# EAGLE board ESP8266-07_Breakout (EAGLE 7.5.0)
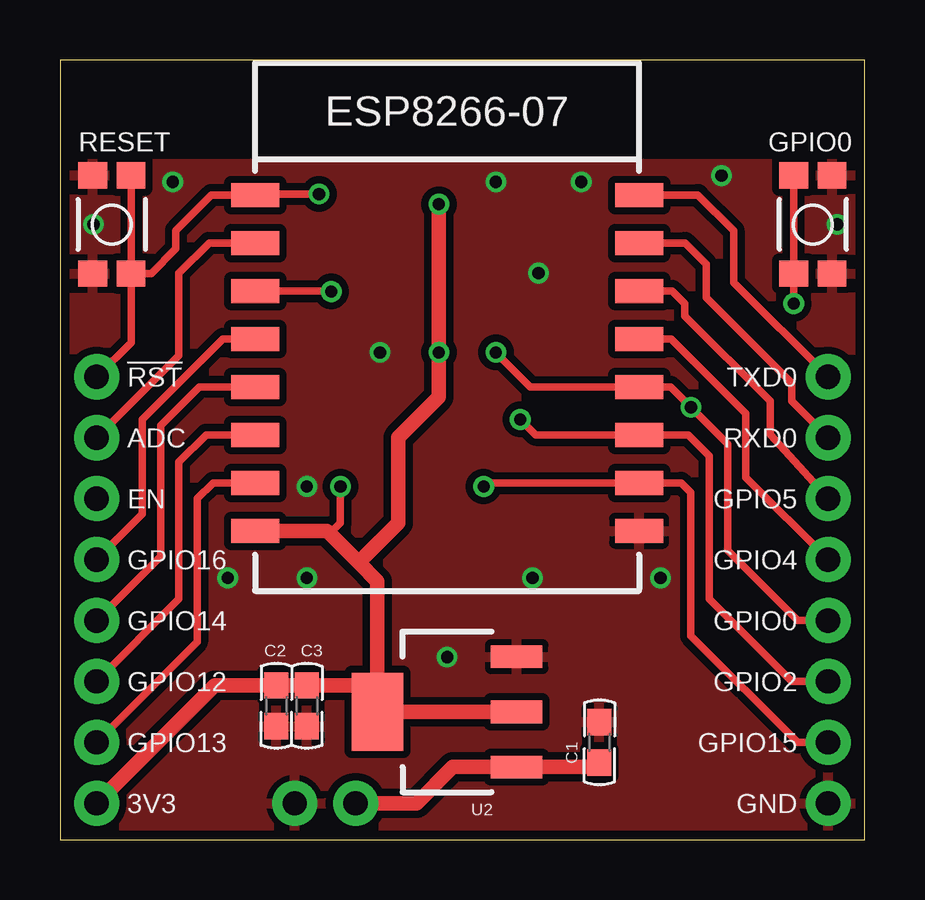
[diagram p0: board, top side]
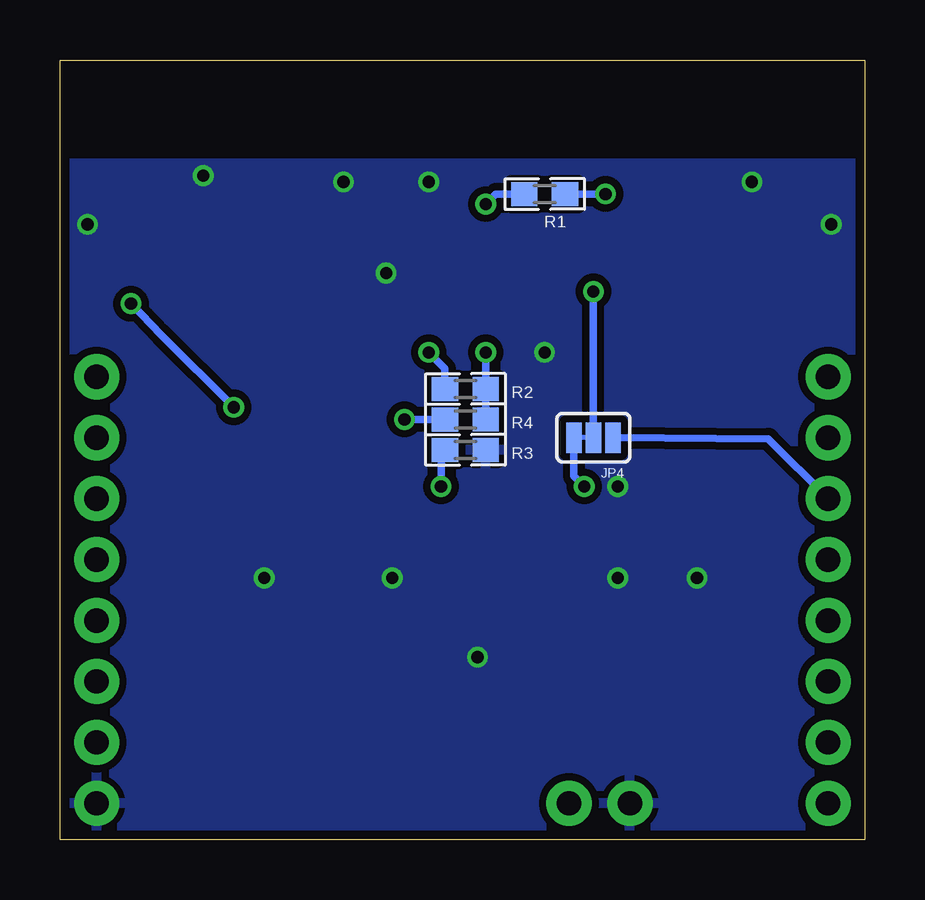
[diagram p1: board, bottom side, seen from below]

Size 33.53 x 32.51 mm. Coordinates in mm from the lower left corner, seen from the top.
Outline: 0,0 33.53,0 33.53,32.51 0,32.51 0,0
Copper layers (1*16): Top 0.0356mm / dielectric 1.5011mm / Bottom 0.0356mm
Design rules "heck": minimum track width 6mil, minimum drill 13mil, track to track 6mil, track to pad 6mil, pad to pad 6mil, via to via 6mil, smd to smd 6mil, copper to edge 15mil, drill to drill 6mil, minimum pad ring 7mil, minimum via ring 7mil, stop-mask expansion 3mil, vias tented up to drill 20mil, thermal gap 10mil

## Footprints (pad centres in the part's own frame; a part is rotated, then mirrored left to right if it is on the bottom)
C0603 = smd 1.1 x 1: 1 -0.85,0; 2 0.85,0
HEADER_100MIL_1X8 = drill 1.016 pad 1.88: 1 -8.89,0; 2 -6.35,0; 3 -3.81,0; 4 -1.27,0; 5 1.27,0; 6 3.81,0; 7 6.35,0; 8 8.89,0
HEADER_100MIL_1X2 = drill 1.016 pad 1.88: 1 -1.27,0; 2 1.27,0
PAD-JUMPER-3-2OF3_NC_BY_TRACE_YES_SILK_FULL_BOX = smd 0.635 x 1.27: 1 -0.813,0; 2 0,0; 3 0.813,0
R0603 = smd 1.1 x 1: 1 -0.85,0; 2 0.85,0
TACTILE_SWITCH_SMD-3 = smd 1.1 x 1.2: 1 -2.05,0.8; 2 2.05,0.8; 3 -2.05,-0.8; 4 2.05,-0.8
ESP8266-07 = smd 1 x 2: 1 11.5,8; 2 9.5,8; 3 7.5,8; 4 5.5,8; 5 3.5,8; 6 1.5,8; 7 -0.5,8; 8 -2.5,8; 9 -2.5,-8; 10 -0.5,-8; 11 1.5,-8; 12 3.5,-8; 13 5.5,-8; 14 7.5,-8; 15 9.5,-8; 16 11.5,-8
SOT223 = smd 0.95 x 2.15: 1 -2.3,-2.9; 2 0,-2.9; 3 2.3,-2.9 | smd 3.25 x 2.15: TAB 0,2.9

## Placement (x,y rotation side)
C1  1uF  [C0603]  22.48,4.06 90 top
C2  1uF  [C0603]  9.02,5.59 270 top
C3  0.1uF  [C0603]  10.29,5.59 270 top
JP1  HEADER_1X8_100MIL_PTH  [HEADER_100MIL_1X8]  32,10.41 270 top
JP2  HEADER_1X8_100MIL_PTH  [HEADER_100MIL_1X8]  1.52,10.41 270 top
JP3  HEADER_1X2_100MIL  [HEADER_100MIL_1X2]  11.05,1.52 180 top
JP4  JUMPER-PAD-3-2OF3_NC_BY_TRACE  [PAD-JUMPER-3-2OF3_NC_BY_TRACE_YES_SILK_FULL_BOX]  11.3,16.76 180 bottom
R1  20K  [R0603]  13.34,26.92 180 bottom
R2  20K  [R0603]  16.64,18.8 0 bottom
R3  20K  [R0603]  16.64,16.26 180 bottom
R4  20K  [R0603]  16.64,17.53 0 bottom
SW1  KMR221GLFS  [TACTILE_SWITCH_SMD-3]  2.16,25.65 270 top
SW2  KMR221GLFS  [TACTILE_SWITCH_SMD-3]  31.37,25.65 90 top
U1  ESP8266-07  [ESP8266-07]  16.13,24.38 270 top
U2  TLV1114DCY  [SOT223]  16.13,5.33 90 top

## Library data of the parts
C1-C3 JP1-JP4 R1-R4 SW1 SW2 U1 U2 = heck

## Nets
3.3V: C2.1 C3.1 JP2.8 JP4.3 R1.2 R2.2 R4.2 U1.16 U2.2 U2.TAB
!RST: JP2.1 R1.1 SW1.1 SW1.2 U1.9
ADC: JP2.2 U1.10
EN: JP4.2 U1.11
GND: C1.2 C2.2 C3.2 JP1.8 JP3.2 R3.1 SW1.3 SW1.4 SW2.3 SW2.4 U1.1 U2.3
GPIO0: JP1.5 R2.1 SW2.1 SW2.2 U1.4
GPIO2: JP1.6 R4.1 U1.3
GPIO4: JP1.4 U1.5
GPIO5: JP1.3 U1.6
GPIO12: JP2.6 U1.14
GPIO13: JP2.7 U1.15
GPIO14: JP2.5 U1.13
GPIO15: JP1.7 R3.2 U1.2
GPIO16: JP2.4 U1.12
N$11: JP2.3 JP4.1
RXD0: JP1.2 U1.7
TXD0: JP1.1 U1.8
VIN: C1.1 JP3.1 U2.1

## Tracks (layer width: path | path; a pad name or v marks a point on that pad's centre or on a via)
3.3V  (via drill 0.51)
  Top 0.305: v11.68,14.73 11.68,13.21 11.24,12.76
  Top 0.61: U1.16 11.12,12.88 11.24,12.76 12.45,11.56 | 12.45,11.56 13.23,10.77 13.23,6.35 | 13.23,6.35 U2.TAB U2.2 | JP2.8 6.44,6.44 C2.1 C3.1 13.14,6.44 13.23,6.35 | 12.45,11.56 14.1,13.21 14.1,16.76 15.79,18.45 v15.79,20.32 v15.79,26.5
  Bottom 0.305: R4.2 R2.2 v15.79,20.32 | R1.2 15.37,26.92 v15.79,26.5 | JP4.3 12.12,15.16 v11.68,14.73
!RST  (via drill 0.51)
  Top 0.305: SW1.1 SW1.2 | v10.79,26.92 8.17,26.92 U1.9 6.31,26.88 4.83,25.4 4.83,24.64 3.79,23.6 SW1.2 | SW1.2 2.96,20.74 JP2.1
  Bottom 0.305: R1.1 v10.79,26.92
ADC
  Top 0.305: U1.10 6.21,24.88 4.95,23.62 4.95,20.19 JP2.2
EN  (via drill 0.51)
  Top 0.305: U1.11 11.28,22.88 v11.3,22.86
  Bottom 0.305: JP4.2 v11.3,22.86
GND  (via drill 0.51)
  other vias: 13.34,20.32 10.29,14.73 1.4,25.65 32.38,25.65 19.94,23.62 19.68,10.92 4.7,27.43 27.56,27.69 21.72,27.43 18.16,27.43 10.29,10.92 6.99,10.92 25.02,10.92 16.13,7.62
  pour Top (isolate 0.305): 0,28.19 33.53,28.19 33.53,0 0,0
  pour Bottom (isolate 0.305): 0,28.19 33.53,28.19 33.53,0 0,0
GPIO0  (via drill 0.51)
  Top 0.305: SW2.1 v30.57,22.35 SW2.2 | v18.16,20.32 19.6,18.88 U1.4 25.44,18.88 v26.29,18.03 27.81,16.51 27.81,12.06 30.73,9.14 JP1.5
  Bottom 0.305: R2.1 17.49,19.65 v18.16,20.32 | v26.29,18.03 29.3,21.04 v30.57,22.35
GPIO2  (via drill 0.51)
  Top 0.305: v19.18,17.53 19.82,16.88 U1.3 26.17,16.88 27.05,16 27.05,10.03 30.48,6.6 JP1.6
  Bottom 0.305: R4.1 v19.18,17.53
GPIO4
  Top 0.305: U1.5 25.47,20.88 28.57,17.78 28.57,15.11 JP1.4
GPIO5
  Top 0.305: U1.6 25.5,22.88 26.04,22.35 26.04,21.84 29.59,18.29 29.59,16.89 JP1.3
GPIO12
  Top 0.305: U1.14 6.09,16.88 4.95,15.75 4.95,10.03 JP2.6
GPIO13
  Top 0.305: U1.15 6.38,14.88 5.71,14.22 5.71,8.26 JP2.7
GPIO14
  Top 0.305: U1.13 5.8,18.88 4.19,17.27 4.19,11.81 JP2.5
GPIO15  (via drill 0.51)
  Top 0.305: v17.65,14.73 17.8,14.88 U1.2 25.88,14.88 26.29,14.48 26.29,8.51 30.73,4.06 JP1.7
  Bottom 0.305: R3.2 17.65,16.09 v17.65,14.73
GPIO16
  Top 0.305: U1.12 6.79,20.88 3.43,17.53 3.43,13.59 JP2.4
N$11
  Bottom 0.305: JP4.1 4.01,16.71 JP2.3
RXD0
  Top 0.305: U1.7 26.04,24.88 26.92,24 26.92,22.61 30.48,19.05 30.48,18.29 JP1.2
TXD0
  Top 0.305: U1.8 26.58,26.88 28.07,25.4 28.07,23.24 JP1.1
VIN
  Top 0.61: C1.1 22.3,3.03 U2.1 16.37,3.03 14.86,1.52 JP3.1

## Text on the board
tNames: RESET | GPIO0 | !RST | TXD0 | ADC | RXD0 | EN | GPIO5 | GPIO16 | GPIO4 | GPIO14 | GPIO0 | GPIO12 | GPIO2 | GPIO13 | GPIO15 | 3V3 | GND